# EAGLE board zasilanie (EAGLE 6.5.0)
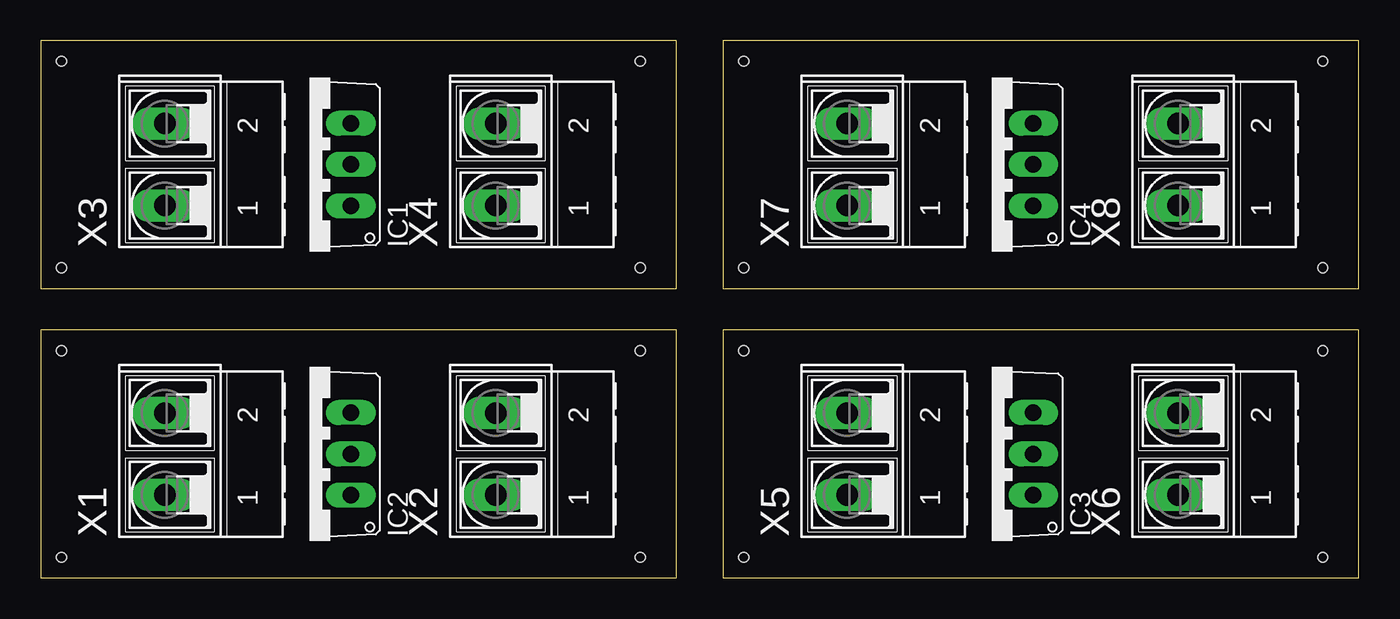
[diagram p0: board, top side]
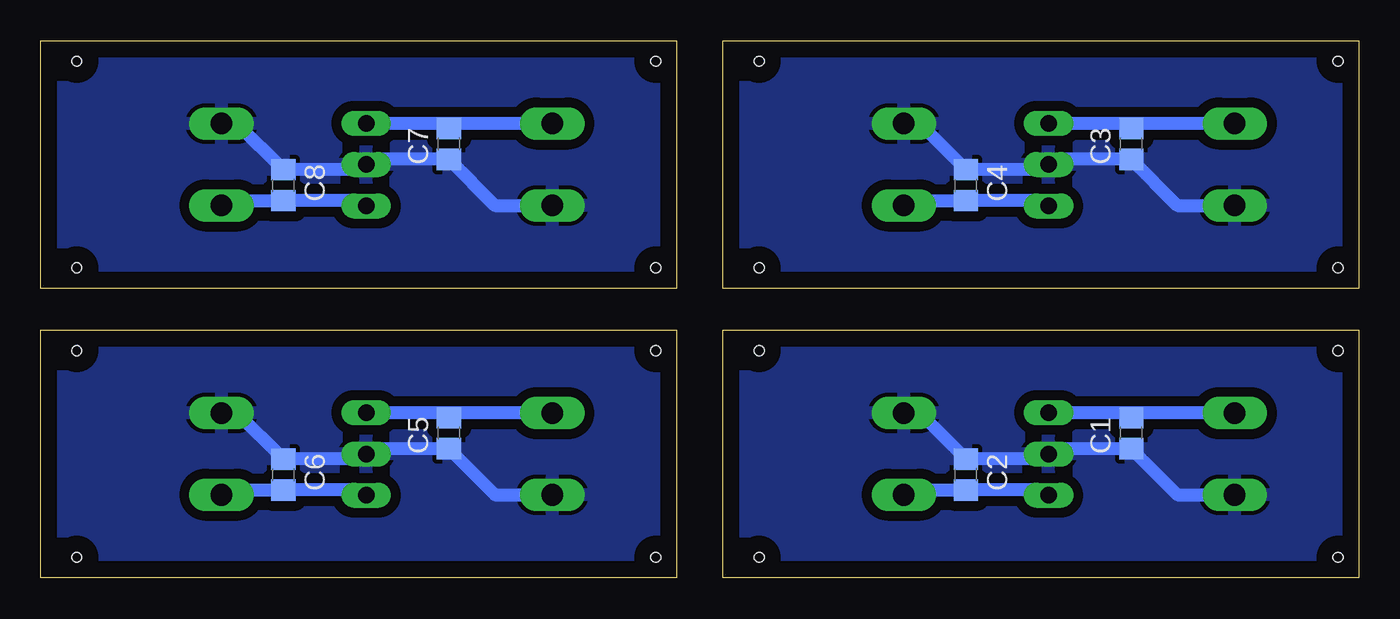
[diagram p1: board, bottom side, seen from below]

Size 80.95 x 33.01 mm. Coordinates in mm from the lower left corner, seen from the top.
Outline: 0,0 39.04,0 39.04,15.23 0,15.23 0,0
Outline: 0,17.78 39.04,17.78 39.04,33.01 0,33.01 0,17.78
Outline: 41.91,0 80.95,0 80.95,15.23 41.91,15.23 41.91,0
Outline: 41.91,17.78 80.95,17.78 80.95,33.01 41.91,33.01 41.91,17.78
Copper layers (1*16): Top 0.035mm / dielectric 1.5mm / Bottom 0.035mm
Design rules "default": minimum track width 10mil, minimum drill 24mil, track to track 8mil, track to pad 8mil, pad to pad 8mil, via to via 8mil, smd to smd 8mil, copper to edge 40mil, drill to drill 8mil, minimum pad ring 10mil, minimum via ring 8mil, stop-mask expansion 4mil, vias tented up to drill 0mil, thermal gap 10mil
Holes 0.6 mm at 1.27,1.27 1.27,13.97 36.83,13.97 36.83,1.27 1.27,19.05 1.27,31.75 36.83,31.75 36.83,19.05 43.18,1.27 43.18,13.97 78.74,13.97 78.74,1.27 43.18,19.05 43.18,31.75 78.74,31.75 78.74,19.05

## Footprints (pad centres in the part's own frame; a part is rotated, then mirrored left to right if it is on the bottom)
C0805 = smd 1.3 x 1.5: 1 -0.95,0; 2 0.95,0
TO220V = drill 1.016 long: 1 -2.54,-2.54; 2 0,-2.54; 3 2.54,-2.54
AK500/2-H = drill 1.321 long: 1 -2.515,0; 2 2.515,0

## Placement (x,y rotation side)
C1  100n  [C0805]  13.97,8.89 90 bottom
C2  100n  [C0805]  24.13,6.35 270 bottom
C3  100n  [C0805]  13.97,26.67 90 bottom
C4  100n  [C0805]  24.13,24.13 270 bottom
C5  100n  [C0805]  55.88,8.89 90 bottom
C6  100n  [C0805]  66.04,6.35 270 bottom
C7  100n  [C0805]  55.88,26.67 90 bottom
C8  100n  [C0805]  66.04,24.13 270 bottom
IC1  7805TV  [TO220V]  16.51,25.4 90 top
IC2  7805TV  [TO220V]  16.51,7.62 90 top
IC3  7805TV  [TO220V]  58.42,7.62 90 top
IC4  7805TV  [TO220V]  58.42,25.4 90 top
X1  [AK500/2-H]  7.62,7.62 90 top
X2  [AK500/2-H]  27.94,7.62 90 top
X3  [AK500/2-H]  7.62,25.4 90 top
X4  [AK500/2-H]  27.94,25.4 90 top
X5  [AK500/2-H]  49.53,7.62 90 top
X6  [AK500/2-H]  69.85,7.62 90 top
X7  [AK500/2-H]  49.53,25.4 90 top
X8  [AK500/2-H]  69.85,25.4 90 top

## Library data of the parts
C1-C8 = rcl
IC1-IC4 = linear
X1-X8 = con-ptr500; OC_FARNELL: unknown; OC_NEWARK: unknown

## Nets
GND: C1.1 C2.1 IC2.2 X1.1 X2.2
GND1: C3.1 C4.1 IC1.2 X3.1 X4.2
GND2: C5.1 C6.1 IC3.2 X5.1 X6.2
GND3: C7.1 C8.1 IC4.2 X7.1 X8.2
N$1: C1.2 IC2.3 X1.2
N$2: C2.2 IC2.1 X2.1
N$3: C3.2 IC1.3 X3.2
N$4: C4.2 IC1.1 X4.1
N$5: C5.2 IC3.3 X5.2
N$6: C6.2 IC3.1 X6.1
N$7: C7.2 IC4.3 X7.2
N$8: C8.2 IC4.1 X8.1

## Tracks (layer width: path | path; a pad name or v marks a point on that pad's centre or on a via)
GND
  Bottom 0.813: X1.1 11.13,5.11 C1.1 19.05,7.94 IC2.2 19.37,7.3 C2.1 26.96,10.13 X2.2
  pour Bottom (isolate 0.61): -1.27,16.51 40.64,16.51 40.64,-1.27 -1.27,-1.27
GND1
  Bottom 0.813: X3.1 11.13,22.88 C3.1 19.05,25.72 IC1.2 19.37,25.08 C4.1 26.96,27.91 X4.2
  pour Bottom (isolate 0.61): -1.27,34.29 40.64,34.29 40.64,16.51 -1.27,16.51
GND2
  Bottom 0.813: X5.1 53.04,5.11 C5.1 60.96,7.94 IC3.2 61.28,7.3 C6.1 68.88,10.13 X6.2
  pour Bottom (isolate 0.61): 40.64,16.51 82.55,16.51 82.55,-1.27 40.64,-1.27
GND3
  Bottom 0.813: X7.1 53.04,22.88 C7.1 60.96,25.72 IC4.2 61.28,25.08 C8.1 68.88,27.91 X8.2
  pour Bottom (isolate 0.61): 40.64,34.29 82.55,34.29 82.55,16.51 40.64,16.51
N$1
  Bottom 0.813: X1.2 13.97,10.13 C1.2 13.97,10.16 IC2.3
N$2
  Bottom 0.813: X2.1 27.64,5.4 C2.2 19.37,5.4 IC2.1
N$3
  Bottom 0.813: X3.2 13.97,27.91 C3.2 13.97,27.94 IC1.3
N$4
  Bottom 0.813: X4.1 27.64,23.18 C4.2 19.37,23.18 IC1.1
N$5
  Bottom 0.813: X5.2 55.88,10.13 C5.2 55.88,10.16 IC3.3
N$6
  Bottom 0.813: X6.1 69.56,5.4 C6.2 61.28,5.4 IC3.1
N$7
  Bottom 0.813: X7.2 55.88,27.91 C7.2 55.88,27.94 IC4.3
N$8
  Bottom 0.813: X8.1 69.56,23.18 C8.2 61.28,23.18 IC4.1